# Altium PCB 电机驱动1.PcbDoc
Units mil, origin at the board's own origin, x right, y up, seen from the top; angles counter-clockwise.
Board outline 6000 x 4000 mil, 2 copper layers (Top Layer, Bottom Layer); 37 components, 23 nets, 101 pads, 16 vias.
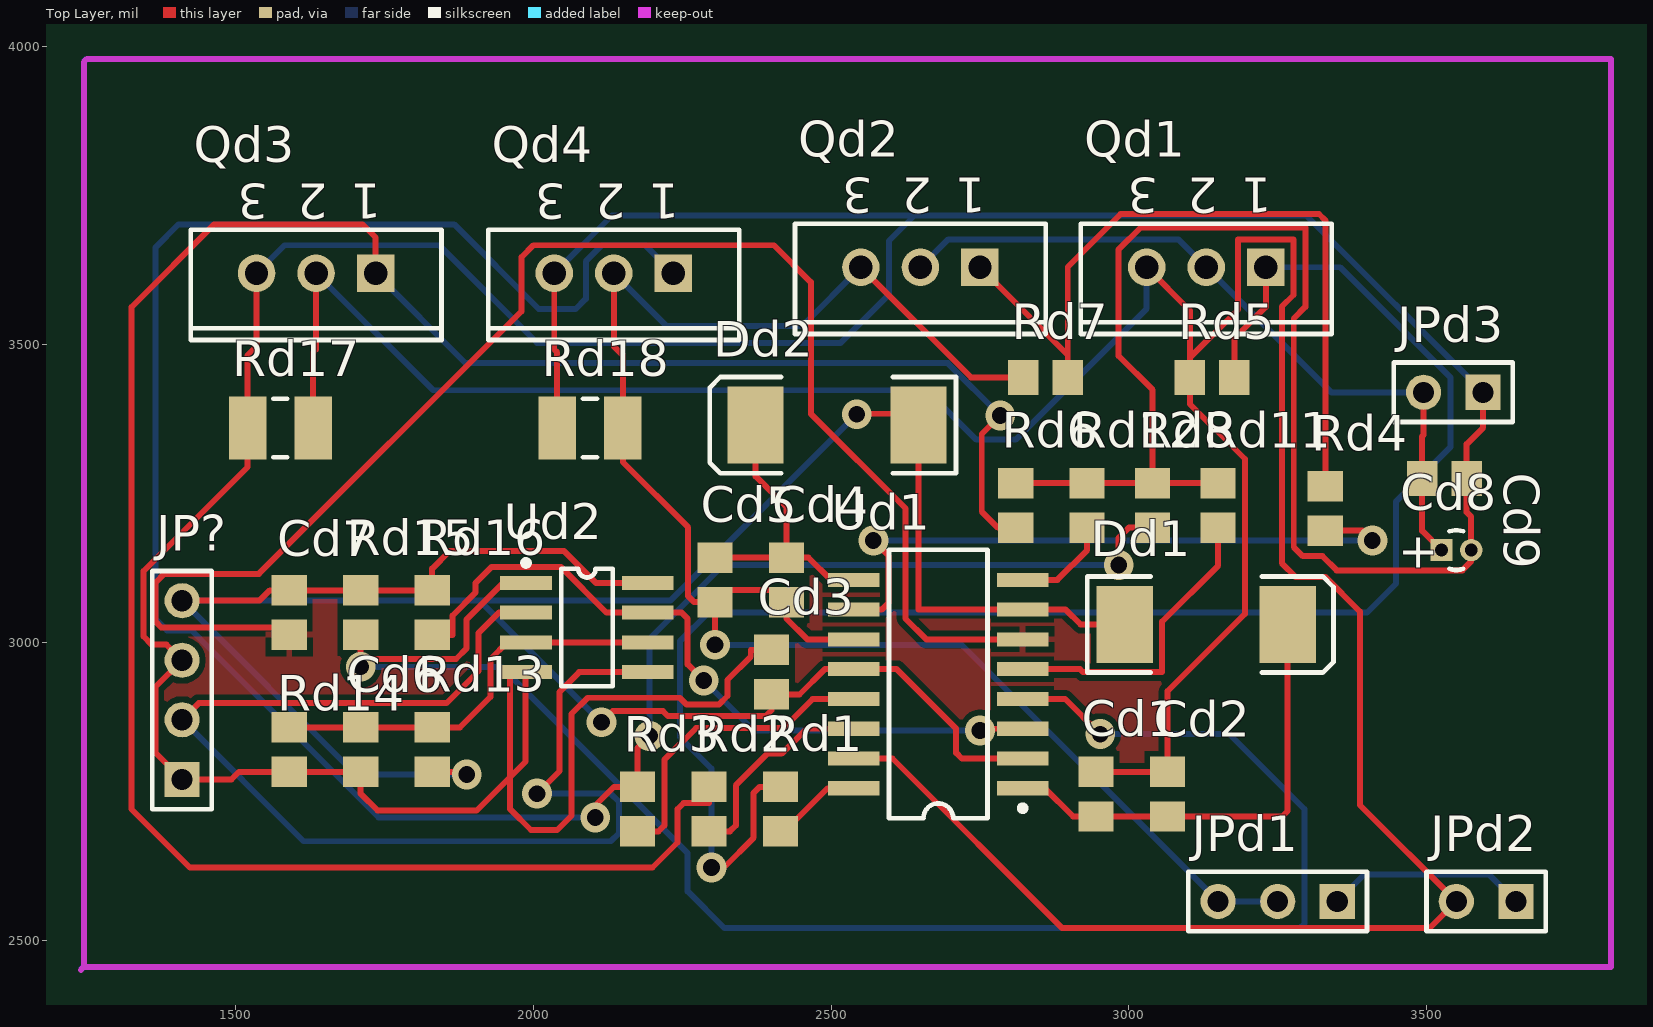
[diagram p0: Top Layer view]
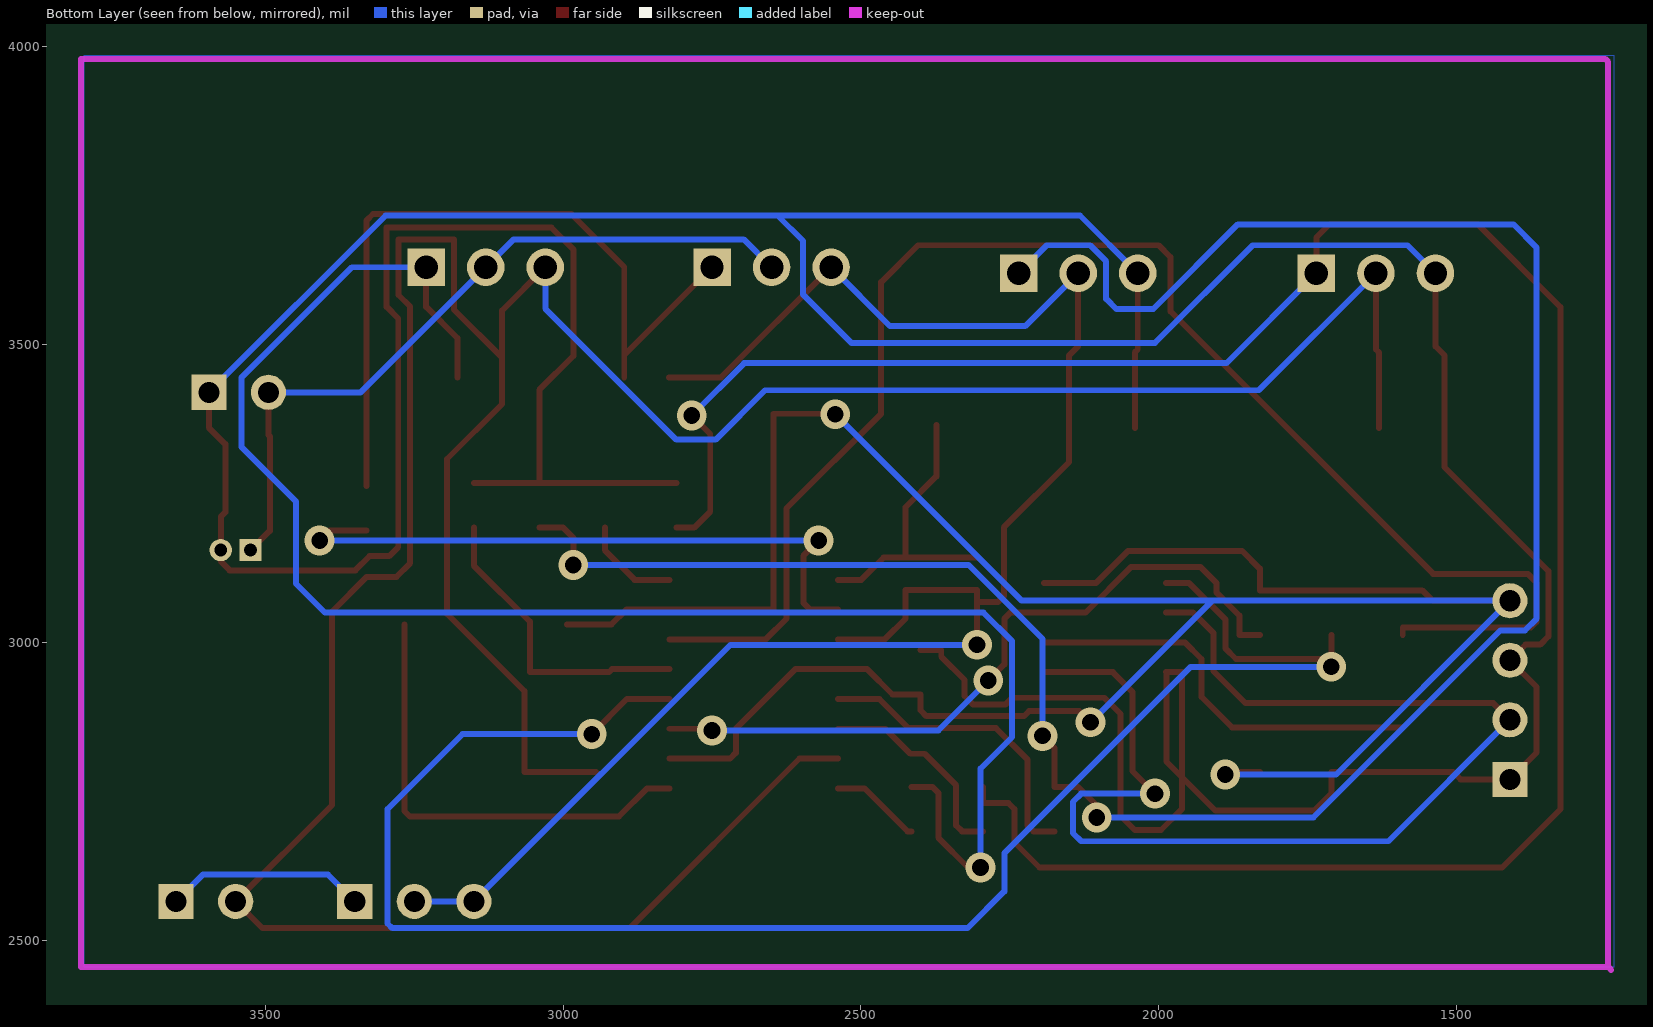
[diagram p1: Bottom Layer view, seen from below]

## Layer stack, top to bottom
Top Layer: signal copper 1.4
Dielectric: dielectric 12.6, FR-4, Dk 4.8
Bottom Layer: signal copper 1.4

## Board outline
1000,1000 7000,1000 7000,5000 1000,5000

## Design rules (kind name [scope] priority, off if disabled: settings)
Clearance [All] p1: gap=10
ComponentClearance [All] p1: gap=10 collisioncheckmode=0
PolygonConnect [All] p1: connectstyle=Relief reliefconductorwidth=10 reliefentries=4 polygonreliefangle="90 Angle"
RoomDefinition 电机驱动 [InComponentClass('电机驱动')] p1: confinementstyle=ConfineIn formatcopy=TRUE lockcomponents=FALSE outline 1260,2470 3795,2470 3795,3975 1260,3975
RoutingVias [All] p1: holewidth=28 width=50 viastyle="Through Hole" minholewidth=28 minwidth=50 maxholewidth=28 maxwidth=50
SolderMaskExpansion [All] p1: expansion=4
TestPointUsage [All] p1: valid=0 allowmultiple=FALSE
Testpoint [All] p1: side=15 testpointundercomponent=TRUE minsize=40 maxsize=100 preferedsize=60 minholesize=0 maxholesize=40 preferedholesize=32 testpointgrid=1 style=1023 order=-539222988
Width [All] p1: maxlimit=10 minlimit=10 preferedwidth=10
17 further rules are at their usual default settings.

## Components (designator, comment, footprint, x,y, rotation, side; value= is the part's Value field where it differs from the comment)
Cd1 "Cap" CR2012-0805 2945,2745 r90 top
Cd2 "Cap" CR2012-0805 3065,2745 r90 top
Cd3 "Cap" CR2012-0805 2400,2950 r90 top
Cd4 "Cap" CR2012-0805 2425,3105 r270 top
Cd5 "Cap" CR2012-0805 2305,3105 r270 top
Cd6 "Cap" CR2012-0805 1710,2820 r90 top
Cd7 "Cap" CR2012-0805 1590,3050 r90 top
Cd8 "Cap Pol1" CAPPR1.27-1.7x2.8 3550,3155 r0 top
Cd9 "Cap" CR2012-0805 3530,3275 r180 top
Dd1 "Diode" DSO-C2/X3.3 3130,3030 r0 top
Dd2 "Diode" DSO-C2/X3.3 2510,3365 r180 top
JP? "Header 4" HDR1X4 1410,2770 r90 top
JPd1 "Header 3" HDR1X3 3350,2565 r180 top
JPd2 "Header 2" HDR1X2 3650,2565 r180 top
JPd3 "Header 2" HDR1X2 3595,3420 r180 top
Qd1 "NMOS-2" SFM-T3/A4.7V 3130,3630 r180 top
Qd2 "NMOS-2" SFM-T3/A4.7V 2650,3630 r180 top
Qd3 "NMOS-2" SFM-T3/A4.7V 1635,3620 r180 top
Qd4 "NMOS-2" SFM-T3/A4.7V 2135,3620 r180 top
Rd1 "Res3" CR2012-0805 2415,2720 r90 top
Rd2 "Res3" CR2012-0805 2295,2720 r90 top
Rd3 "Res3" CR2012-0805 2175,2720 r90 top
Rd4 "Res3" CR2012-0805 3330,3225 r90 top
Rd5 "Res3" CR2012-0805 3140,3445 r180 top
Rd6 "Res3" CR2012-0805 2810,3230 r90 top
Rd7 "Res3" CR2012-0805 2860,3445 r180 top
Rd8 "Res3" CR2012-0805 3040,3230 r90 top
Rd11 "Res3" CR2012-0805 3150,3230 r270 top
Rd12 "Res3" CR2012-0805 2930,3230 r270 top
Rd13 "Res1" CR2012-0805 1830,2820 r270 top
Rd14 "Res1" CR2012-0805 1590,2820 r90 top
Rd15 "Res1" CR2012-0805 1710,3050 r90 top
Rd16 "Res1" CR2012-0805 1830,3050 r90 top
Rd17 "Res3" CR3225-1210 1575,3360 r180 top
Rd18 "Res3" CR3225-1210 2095,3360 r180 top
Ud1 "HIP4082" sop16 2680,2930 r90 top
Ud2 "LM193AD" SO8 2090,3025 r270 top

## Footprints (in the part's own frame and the unit in brackets; to place one, negate y for a bottom-side part, rotate by r counter-clockwise, add the part's x,y. Pads: shape width x height; smd on the part's side, far side on the other; paste and mask are expansions set on the pad)
CAPPR1.27-1.7x2.8 [mm] "Capacitor, Radial, Tantalum; Body 1.7 x 2.8 mm (Dia.xH max); Pin Spacing 1.27 mm (typ)"
  rect 0.95x0.95 hole 0.55: 1(-0.635,0)
  round 0.95 hole 0.55: 2(0.635,0)
  silkscreen extent -0.29,-0.85 0.29,0.85
CR2012-0805 [mm] "Chip Resistor; Body 2.0 x 1.3 mm (LxW typ)"
  rect 1.3x1.5 smd: 1(-0.95,0) 2(0.95,0)
CR3225-1210 [mm] "Chip Resistor; Body 3.2 x 2.5 mm (LxW typ)"
  rect 1.6x2.7 smd: 1(-1.4,0) 2(1.4,0)
  silkscreen extent -0.3,-1.25 0.3,1.25
DSO-C2/X3.3 [mm] "DO-214-AB/SMC; 2 C-Bend Leads; Body 7.9 x 5.9 mm, inc. leads (LxW)"
  rect 2.4x3.3 smd: 1(-3.475,0) 2(3.475,0)
  silkscreen extent -5.08,-2.05 5.42,2.06
HDR1X2 [mm] "Connector; Header; 2 Position"
  rect 1.5x1.5 hole 0.9: 1(0,0)
  round 1.5 hole 0.9: 2(2.54,0)
  silkscreen extent -1.27,-1.27 3.81,1.27
HDR1X3 [mm] "Connector; Header; 3 Position"
  rect 1.5x1.5 hole 0.9: 1(0,0)
  round 1.5 hole 0.9: 2(2.54,0) 3(5.08,0)
  silkscreen extent -1.27,-1.27 6.35,1.27
HDR1X4 [mm] "Connector; Header; 4 Position"
  rect 1.5x1.5 hole 0.9: 1(0,0)
  round 1.5 hole 0.9: 2(2.54,0) 3(5.08,0) 4(7.62,0)
  silkscreen extent -1.27,-1.27 8.89,1.27
SFM-T3/A4.7V [mm] "TO, Thru-Hole, Vertical, Heatsink Mounted; 3 In-Line Leads; Pitch 2.54 mm"
  rect 1.6x1.6 hole 1: 1(-2.54,0)
  round 1.6 hole 1: 2(0,0) 3(2.54,0)
  silkscreen extent -5.35,-1.85 5.35,2.85
SO8 [mm] "Small Outline; 8 Leads; Body Width 3.9 mm; Pitch 1.27 mm"
  rect 0.6x2.2 smd: 1(-1.905,-2.6) 2(-0.635,-2.6) 3(0.635,-2.6) 4(1.905,-2.6) 5(1.905,2.6) 6(0.635,2.6) 7(-0.635,2.6) 8(-1.905,2.6)
  silkscreen extent -2.88,-2.72 2.5,1.1
sop16 [mm] "Small Outline; 16 Leads; Body Width 5.6 mm; Pitch 1.27 mm"
  rect 0.6x2.2 smd: 1(-4.445,-3.6) 2(-3.175,-3.6) 3(-1.905,-3.6) 4(-0.635,-3.6) 5(0.635,-3.6) 6(1.905,-3.6) 7(3.175,-3.6) 8(4.445,-3.6) 9(4.445,3.6) 10(3.175,3.6) 11(1.905,3.6) 12(0.635,3.6) 13(-0.635,3.6) 14(-1.905,3.6) 15(-3.175,3.6) 16(-4.445,3.6)
  silkscreen extent -5.73,-3.73 5.73,2.1

## Part data
Cd1 Cd2 Cd3 Cd4 Cd5 Cd6 Cd7 Cd9: "Capacitor"
Cd8: "Polarized Capacitor (Radial)"
Dd1 Dd2: "Default Diode"
JP?: "Header, 4-Pin"
JPd1: "Header, 3-Pin"
JPd2 JPd3: "Header, 2-Pin"
Qd1 Qd2 Qd3 Qd4: "N-Channel Power MOSFET"
Rd1 Rd2 Rd3 Rd4 Rd5 Rd6 Rd7 Rd8 Rd11 Rd12 Rd13 Rd14 Rd15 Rd16 Rd17 Rd18: "Resistor"
Ud2: "Low-Power Dual Voltage Comparator"

## Via types
v1: diameter 50, hole 28, Top Layer to Bottom Layer, 16 vias

## Nets (pads, with @x,y where several pads share a name; then routed paths per layer and width w, separated by ;. In a path a pad name is that pad's centre, name@x,y a point inside that pad or via, vN(x,y) a via of type N, cw(c..) or ccw(c..) an arc to the next point about the centre after c; other vN are vias at no path point)
AHO: Qd2.1 Rd4.2 Rd7.1 | length 1314.1
  Top Layer w10: Qd2.1 2897.4,3482.6 ; Rd7.1 2897.4,3482.6 ; Rd4.2 3330,3708.76 3319.38,3719.38 2986.38,3719.38 2897.4,3630.4 2897.4,3482.6
AHS: Cd4.2 Cd5.2 JPd1.2 JPd1.3 Qd2.3 Qd4.2 Rd7.2 Rd18.1 Ud1.11 | length 2996.7
  Top Layer w10: Qd4.2 2135,3497.12 2150.12,3482 Rd18.1 2150.12,3303 2260,3193.12 2260,3077.6 2270,3067.6 Cd5.2 ; v1(2305,2996) Cd5.2 ; Ud1.11 2460,3005 2425,3040 Cd4.2 2425,3087.99 2305,3087.99 Cd5.2 ; Qd2.3 2735,3445 Rd7.2
  Bottom Layer w10: Qd4.2 2224,3531 2451,3531 Qd2.3 ; v1(2305,2996) 2719,2996 JPd1.3 JPd1.2
ALO: Qd4.1 Rd3.2 Rd8.1 | length 3855.9
  Top Layer w10: v1(2104,2706) 2104,2726 2135.4,2757.4 Rd3.2 2175,2823 v1(2195,2843) ; v1(2983,3130) 2983,3175.6 3000,3192.6 Rd8.1
  Bottom Layer w10: v1(2104,2706) 1740,2706 1426,3020 1385,3020 1365,3040 1365,3663 1404,3702 1867,3702 2009,3560 2071,3560 2088,3577 2088,3640 2115,3667 2188,3667 Qd4.1 ; v1(2195,2843) 2195,3006 2319,3130 v1(2983,3130)
BHO: Qd1.1 Rd1.2 Rd5.1 | length 2838.5
  Top Layer w10: v1(2299,2622) 2320,2622 2370,2672 2370,2747.4 2380,2757.4 Rd1.2 ; Rd5.1 3177.4,3511 3230,3563.6 Qd1.1
  Bottom Layer w10: v1(2299,2622) 2299,2788 2246,2841 2246,3002 2294,3050 3400,3050 3449,3099 3449,3237 3540,3328 3540,3445 3355,3630 Qd1.1
BHS: Cd1.2 Cd2.2 JPd2.2 Qd1.3 Qd3.2 Rd5.2 Rd17.1 Ud1.15 | length 5766.8
  Top Layer w10: Rd17.1 1630.12,3487 1635,3491.88 Qd3.2 ; Ud1.15 2603,2805 2888,2520 3505,2520 JPd2.2 3388,2727 3388,3051.96 3330,3109.96 3280,3109.96 3257,3132.96 3257,3564.01 3276.5,3583.5 3276.5,3676.5 3183.5,3676.5 3183.5,3559 3102.6,3478.09 ; Cd1.2 Cd2.2 3065,2918.05 3195,3048.05 3195,3308 3102.6,3400.4 Rd5.2 3102.6,3478.09 ; Qd1.3 3102.6,3557.4 3102.6,3478.09
  Bottom Layer w10: Qd3.2 1831.56,3423.44 2661.03,3423.44 2744,3340.47 2810,3340.47 3030,3560.47 Qd1.3
BLO: Qd3.1 Rd2.2 Rd6.1 | length 3885.6
  Top Layer w10: Qd3.1 1735,3680 1713,3702 1464,3702 1325,3563 1325,2720 1423,2622 2200,2622 2242,2664 2242,2720 2252,2730 2295,2730 Rd2.2 ; v1(2784,3381) 2753,3350 2753,3219.6 2780,3192.6 Rd6.1
  Bottom Layer w10: Qd3.1 1886,3469 2696,3469 v1(2784,3381)
CMP: Cd6.2 Rd13.1 Rd14.2 Ud2.3 Ud2.6 | length 698.6
  Top Layer w10: Rd14.2 Cd6.2 Rd13.1 1876.79,2857.4 1928,2908.61 1928,2972 1956,3000 Ud2.3 Ud2.6
DGND: Cd7.1 Ud1.6 | length 2563.1
  Top Layer w10: Cd7.1 1590,3025 1375,3025 1365.47,3034.53 1365.47,3100.47 1380,3115 1539,3115 1980,3556 1980,3647 2000,3667 2404,3667 2466,3605 2466,3384 2625,3225 2625,3040 2660,3005 Ud1.6
MOTOR-: JPd1.1 JPd2.1 | length 337.3
  Bottom Layer w10: JPd1.1 3395,2610 3605,2610 JPd2.1
MOTOR_CTL: JP?.2 Ud2.2 Ud2.5 | length 2058.6
  Top Layer w10: JP?.2 1438,2898 1854,2898 1908,2952 1908,3016 1942,3050 Ud2.2 ; v1(2006,2746) 2044,2784 2044,2917.05 2076.95,2950 Ud2.5
  Bottom Layer w10: JP?.2 1614,2666 2130,2666 2144,2680 2144,2732 2130,2746 v1(2006,2746)
MOTOR_CTL+: Rd15.1 Ud1.4 Ud2.1 | length 2962.3
  Top Layer w10: v1(1710,2959) v1@1710,2972 ; Rd15.1 v1@1710,2972 ; Ud2.1 1949.33,3100 1888,3038.67 1888,2990 1870,2972 v1@1710,2972 ; Ud1.4 2893,2905 v1(2952,2846)
  Bottom Layer w10: v1(1710,2959) 1946,2959 2259,2646 2259,2582 2321,2520 3287,2520 3295,2528 3295,2720 3169,2846 v1(2952,2846)
MOTOR_CTL-: Rd16.1 Ud1.3 Ud2.7 | length 1227.6
  Top Layer w10: Rd16.1 1864.06,3012.6 1864.06,3045 1903.06,3084 1903.06,3100 1929.87,3126.81 2046,3126.81 2122.81,3050 Ud2.7 2249,3050 2259,3040 2259,2963 v1(2286,2936) ; v1(2750,2852) 2753,2855 Ud1.3
  Bottom Layer w10: v1(2286,2936) 2370,2852 v1(2750,2852)
NetCd1_1: Cd1.1 Cd2.1 Dd1.2 Ud1.1 | length 781.7
  Top Layer w10: Ud1.1 2859,2755 2906.4,2707.6 Cd1.1 Cd2.1 3257.6,2707.6 3266.81,2716.81 Dd1.2
NetCd4_1: Cd4.1 Cd5.1 Dd2.2 Ud1.9 | length 492.8
  Top Layer w10: Cd5.1 Cd4.1 ; Dd2.2 2373.19,3278.81 2425,3227 Cd4.1 ; Ud1.9 2499.4,3105 2462,3142.4 Cd4.1
NetRd1_1: Rd1.1 Ud1.16 | length 153.3
  Top Layer w10: Rd1.1 2421.6,2682.6 2494,2755 Ud1.16
NetRd2_1: Rd2.1 Ud1.14 | length 354.2
  Top Layer w10: Rd2.1 2330,2682.6 2340,2692.6 2340,2760 2393,2813 2417,2813 2459,2855 Ud1.14
NetRd3_1: Rd3.1 Ud1.13 | length 520.1
  Top Layer w10: Rd3.1 2210,2682.6 2220,2692.6 2220,2803 2273,2856 2420,2856 2469,2905 Ud1.13
NetRd4_1: Rd4.1 Ud1.10 | length 1102
  Top Layer w10: Ud1.10 2585,3055 2596.58,3066.58 2596.58,3145.42 v1(2571,3171) ; Rd4.1 3392.4,3187.6 v1(3409,3171)
  Bottom Layer w10: v1(2571,3171) v1(3409,3171)
NetRd11_2: Rd11.2 Ud1.5 | length 517.9
  Top Layer w10: Ud1.5 2918,2955 2923,2950 3056,2950 3056,3035 3150,3129 Rd11.2
NetRd12_2: Rd12.2 Ud1.8 | length 166.6
  Top Layer w10: Ud1.8 2880,3105 2930,3155 Rd12.2
PGND: Cd3.2 Cd6.1 Cd8.2 Cd9.1 JP?.1 JP?.3 JPd3.1 Qd3.3 Qd4.3 Rd6.2 Rd8.2 Rd11.1 Rd12.1 Rd14.1 Rd17.2 Rd18.2 Ud2.4 | length 8356
  Top Layer w10: Qd3.3 1535,3497.12 1519.88,3482 Rd17.2 1519.88,3294.41 1345.47,3120 1345.47,3010 1359.2,2996.28 1383.72,2996.28 JP?.3 1365,2925 1365,2815 JP?.1 1493,2770 1505.6,2782.6 Rd14.1 Cd6.1 1710,2746 1738.33,2717.67 1904.67,2717.67 1961,2774 ; Ud2.4 Ud2.4@1987,2950 ; Qd4.3 2035,3491.88 2039.88,3487 Rd18.2 ; Cd3.2 2365,2987.4 2365,2976 2326,2937 2326,2910 2312,2896 2257,2896 2246,2907 2091,2907 2064,2880 2064,2709 2040,2685 1996,2685 1961,2720 1961,2774 ; Rd6.2 Rd12.1 Rd8.2 ; Rd11.1 Rd8.2 ; JPd3.1 3595,3360.6 3567.4,3333 Cd9.1 3567.4,3218.6 3575,3211 Cd8.2 3575,3136 3560,3121 3349.06,3121 3325.27,3144.79 3292.21,3144.79 3277,3160 3277,3544.01 3296.5,3563.5 3296.5,3696.5 3019.5,3696.5 2983,3660 2983,3481 3040,3424 Rd8.2 ; 1961,2774 1987,2800 Ud2.4@1987,2950 ; 1961,2774 1961,2950 Ud2.4@1987,2950
  Bottom Layer w10: Qd3.3 1582,3667 1842,3667 2006,3503 2516,3503 2597,3584 2597,3674 2640,3717 ; Qd4.3 2132,3717 2640,3717 ; JPd3.1 3298,3717 2640,3717
V+12: Cd3.1 Cd7.2 Dd1.1 Dd2.1 JP?.4 Rd13.2 Rd15.2 Rd16.2 Ud1.2 Ud1.7 Ud1.12 Ud2.8 | length 4713.9
  Top Layer w10: JP?.4 1539.88,3070 1557.28,3087.4 Cd7.2 Rd15.2 Rd16.2 1830,3123.78 1860,3153.78 2051.22,3153.78 2105,3100 Ud2.8 ; Rd13.2 1883.4,2782.6 v1(1888,2778) ; v1(2114.25,2865.75) 2133.25,2884.75 2217.36,2884.75 2226.11,2876 2390,2876 2400,2886 Cd3.1 2447,2912.6 2489.4,2955 Ud1.12 2610,2955 2710,2855 2710,2814.58 2719.58,2805 Ud1.2 ; v1(2543,3383) 2544,3384 2646.81,3384 Dd2.1 2646.81,3055.19 2647,3055 Ud1.7 2894,3055 2919,3030 Dd1.1
  Bottom Layer w10: v1(1888,2778) 1702,2778 JP?.4 1910,3070 ; v1(2114.25,2865.75) 1910,3070 ; v1(2543,3383) 2230,3070 1910,3070
VBAT: Cd8.1 Cd9.2 JPd3.2 Qd1.2 Qd2.2 | length 1250.3
  Top Layer w10: JPd3.2 3495,3348.4 3492.6,3346 Cd9.2 3492.6,3187.4 Cd8.1
  Bottom Layer w10: Qd2.2 2697,3677 3083,3677 Qd1.2 3340,3420 JPd3.2

## Polygon pours and split planes (outlines as drawn)
DGND on Top Layer (solid, remove dead copper): 1240,3980 3805,3980 3805,2455 1240,2455
DGND on Bottom Layer (solid, remove dead copper): 1235,3985 3805,3985 3805,2455 1235,2455

## Keep-outs
Keep-Out Layer:
  lines w10: 1245,2455 3810,2455 3810,3980 1250,3980 1245,3975 1245,2455 ; 1245,2455 1240,2450 1245,2455

## Text inside footprints (layer, text, board x,y; h text height)
Cd8: Top Overlay "+" at 3452.17,3125.47 h59.06
Qd1: Top Overlay "3" at 3049.68,3780.59 h59.06 r180; Top Overlay "1" at 3239.84,3780.59 h59.06 r180; Top Overlay "2" at 3149.68,3780.59 h59.06 r180
Qd2: Top Overlay "3" at 2569.68,3780.59 h59.06 r180; Top Overlay "1" at 2759.84,3780.59 h59.06 r180; Top Overlay "2" at 2669.68,3780.59 h59.06 r180
Qd3: Top Overlay "3" at 1554.68,3770.59 h59.06 r180; Top Overlay "1" at 1744.84,3770.59 h59.06 r180; Top Overlay "2" at 1654.68,3770.59 h59.06 r180
Qd4: Top Overlay "3" at 2054.68,3770.59 h59.06 r180; Top Overlay "1" at 2244.84,3770.59 h59.06 r180; Top Overlay "2" at 2154.68,3770.59 h59.06 r180